# Altium PCB ATMEGA8_S52.PcbDoc
Units mil, origin at the board's own origin, x right, y up, seen from the top; angles counter-clockwise.
Board outline 6000 x 4000 mil, 2 copper layers (Top Layer, Bottom Layer); 2 components, 39 nets, 68 pads, 6 vias.
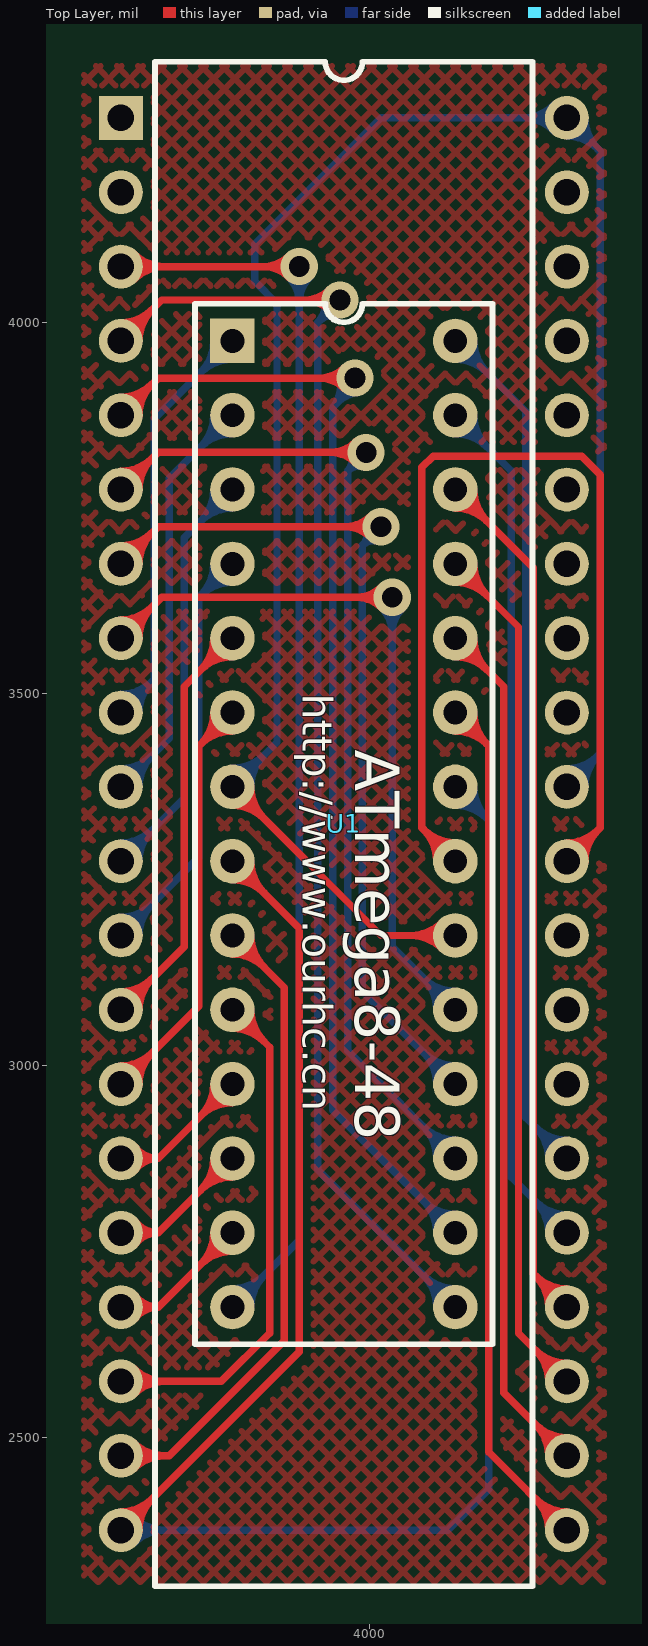
[diagram p0: Top Layer view]
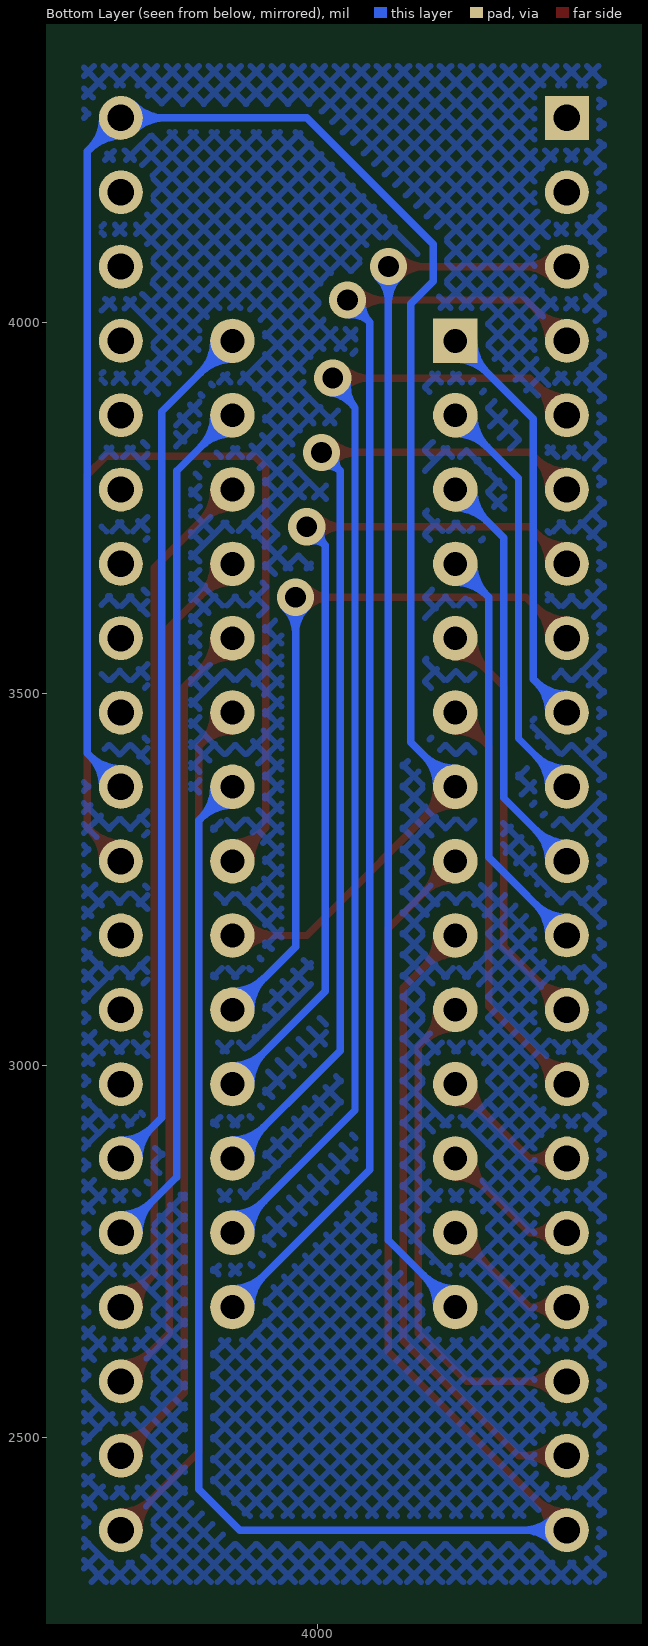
[diagram p1: Bottom Layer view, seen from below]

## Layer stack, top to bottom
Top Layer: signal copper 1.4
Dielectric: dielectric 12.6, FR-4, Dk 4.8
Bottom Layer: signal copper 1.4

## Board outline
1000,1000 7000,1000 7000,5000 1000,5000

## Design rules (kind name [scope] priority, off if disabled: settings)
Clearance [All] p1: gap=10
ComponentClearance [All] p1: gap=10 collisioncheckmode=3 verticalgap=10
PolygonConnect [All] p1: connectstyle=Relief reliefconductorwidth=10 reliefentries=4 polygonreliefangle="90 Angle"
RoutingVias [All] p1: holewidth=28 width=50 viastyle="Through Hole" minholewidth=28 minwidth=50 maxholewidth=28 maxwidth=50
SolderMaskExpansion [All] p1: expansion=4
TestPointUsage [All] p1: valid=0 allowmultiple=FALSE
Testpoint [All] p1: side=15 testpointundercomponent=TRUE minsize=40 maxsize=100 preferedsize=60 minholesize=0 maxholesize=40 preferedholesize=32 testpointgrid=1 style=1023 order=0123456789
Width [All] p1: maxlimit=10 minlimit=10 preferedwidth=10
17 further rules are at their usual default settings.

## Components (designator, comment, footprint, x,y, rotation, side; value= is the part's Value field where it differs from the comment)
ATmega8-48 "ATmega8-16PI" 底座DIP-28/引脚7.62mm 3965,3325 r270 top
U1 "AT89S52" DIP-40 3965,3325 r270 top

## Footprints (in the part's own frame and the unit in brackets; to place one, negate y for a bottom-side part, rotate by r counter-clockwise, add the part's x,y. Pads: shape width x height; smd on the part's side, far side on the other; paste and mask are expansions set on the pad)
DIP-40 [mm] "DIP; 40 Leads; Row Spacing 15.24 mm; Pitch 2.54 mm"
  rect 1.5x1.5 hole 0.9: 1(-24.13,-7.62)
  round 1.5 hole 0.9: 2(-21.59,-7.62) 3(-19.05,-7.62) 4(-16.51,-7.62) 5(-13.97,-7.62) 6(-11.43,-7.62) 7(-8.89,-7.62) 8(-6.35,-7.62) 9(-3.81,-7.62) 10(-1.27,-7.62) 11(1.27,-7.62) 12(3.81,-7.62) 13(6.35,-7.62) 14(8.89,-7.62) 15(11.43,-7.62) 16(13.97,-7.62) 17(16.51,-7.62) 18(19.05,-7.62) 19(21.59,-7.62) 20(24.13,-7.62) 21(24.13,7.62) 22(21.59,7.62) 23(19.05,7.62) 24(16.51,7.62) 25(13.97,7.62) 26(11.43,7.62) 27(8.89,7.62) 28(6.35,7.62) 29(3.81,7.62) 30(1.27,7.62) 31(-1.27,7.62) 32(-3.81,7.62) 33(-6.35,7.62) 34(-8.89,7.62) 35(-11.43,7.62) 36(-13.97,7.62) 37(-16.51,7.62) 38(-19.05,7.62) 39(-21.59,7.62) 40(-24.13,7.62)
  silkscreen extent -26.05,-6.45 26.05,6.45
底座DIP-28/引脚7.62mm [mil] "引脚跨度 ：300 Mil ，主体外形 10.1×35.5mm（400×1400Mil）"
  rect 60x60 hole 32: 1(-650,-150)
  round 60 hole 32: 2(-550,-150) 3(-450,-150) 4(-350,-150) 5(-250,-150) 6(-150,-150) 7(-50,-150) 8(50,-150) 9(150,-150) 10(250,-150) 11(350,-150) 12(450,-150) 13(550,-150) 14(650,-150) 15(650,150) 16(550,150) 17(450,150) 18(350,150) 19(250,150) 20(150,150) 21(50,150) 22(-50,150) 23(-150,150) 24(-250,150) 25(-350,150) 26(-450,150) 27(-550,150) 28(-650,150)
  silkscreen extent -700,-200 700,200

## Part data
ATmega8-48: library part ATmega8-P, "8 位微处理器/28引脚"
U1: library part 8051

## Via types
v1: diameter 50, hole 28, Top Layer to Bottom Layer, 6 vias

## Nets (pads, with @x,y where several pads share a name; then routed paths per layer and width w, separated by ;. In a path a pad name is that pad's centre, name@x,y a point inside that pad or via, vN(x,y) a via of type N, cw(c..) or ccw(c..) an arc to the next point about the centre after c; other vN are vias at no path point)
ALE: ATmega8-48.21 U1.30 | length 1643.6
  Top Layer w10: ATmega8-48.21@4090,3275 ccw(c4029.64,3275) 4072.32,3317.68 ccw(c4115,3360.36) ATmega8-48.21@4115,3300 ; ATmega8-48.21@4100,3275 ccw(c4063.79,3275) 4089.39,3300.61 ccw(c4115,3326.21) ATmega8-48.21@4115,3290 ; ATmega8-48.21 4070,3320 4070,3805 4085,3820 4285,3820 4310,3795 4310,3320 U1.30 ; U1.30@4265,3289.53 ccw(c4265,3324.6) 4289.8,3299.8 ccw(c4314.6,3275) U1.30@4279.53,3275 ; U1.30@4265,3299.53 ccw(c4265,3358.74) 4306.87,3316.87 ccw(c4348.74,3275) U1.30@4289.53,3275
GND: ATmega8-48.8 ATmega8-48.22 U1.20 | length 3117.7
  Top Layer w10: U1.20 3905,2615 3905,3185 ATmega8-48.8 ; U1.20@3665,2389.53 ccw(c3665,2424.6) 3689.8,2399.8 ccw(c3714.6,2375) U1.20@3679.53,2375 ; U1.20@3665,2399.53 ccw(c3665,2458.74) 3706.87,2416.87 ccw(c3748.74,2375) U1.20@3689.53,2375 ; ATmega8-48.8@3815,3250 cw(c3815,3189.64) 3857.68,3232.32 cw(c3900.36,3275) ATmega8-48.8@3840,3275 ; ATmega8-48.8@3815,3260 cw(c3815,3223.79) 3840.61,3249.39 cw(c3866.21,3275) ATmega8-48.8@3830,3275
  Bottom Layer w10: U1.20 4105,2375 4160,2430 4160,3330 ATmega8-48.22 ; U1.20@3675.27,2364.73 cw(c3700.07,2339.93) 3700.07,2375 cw(c3700.07,2410.07) U1.20@3675.27,2385.27 ; U1.20@3682.34,2357.66 cw(c3724.21,2315.79) 3724.21,2375 cw(c3724.21,2434.21) U1.20@3682.34,2392.34 ; ATmega8-48.22@4115,3350 cw(c4115,3289.64) 4157.68,3332.32 cw(c4200.36,3375) ATmega8-48.22@4140,3375 ; ATmega8-48.22@4115,3360 cw(c4115,3323.79) 4140.61,3349.39 cw(c4166.21,3375) ATmega8-48.22@4130,3375
P0.0: U1.39
P0.1: U1.38
P0.2: U1.37
P0.3: U1.36
P0.4: U1.35
P0.5: U1.34
P0.6: U1.33
P0.7: U1.32
P1.0: U1.1
P1.1: U1.2
P1.2: ATmega8-48.14 U1.3 | length 2128.8
  Top Layer w10: U1.3 v1(3905,4075) ; U1.3@3675.27,4064.73 cw(c3700.07,4039.93) 3700.07,4075 cw(c3700.07,4110.07) U1.3@3675.27,4085.27 ; U1.3@3682.34,4057.66 cw(c3724.21,4015.79) 3724.21,4075 cw(c3724.21,4134.21) U1.3@3682.34,4092.34 ; v1@3890.86,4060.86 ccw(c3856.72,4026.72) 3856.72,4075 ccw(c3856.72,4123.28) v1@3890.86,4089.14
  Bottom Layer w10: ATmega8-48.14 3905,2765 v1(3905,4075) ; ATmega8-48.14@3815,2690 ccw(c3815,2726.21) 3840.61,2700.61 ccw(c3866.21,2675) ATmega8-48.14@3830,2675 ; ATmega8-48.14@3815,2700 ccw(c3815,2760.36) 3857.68,2717.68 ccw(c3900.36,2675) ATmega8-48.14@3840,2675 ; v1@3890.86,4060.86 cw(c3856.72,4026.72) 3905,4026.72 cw(c3953.28,4026.72) v1@3919.14,4060.86
P1.3: ATmega8-48.15 U1.4 | length 2199.1
  Top Layer w10: U1.4 3720,4030 v1(3960,4030) ; U1.4@3665,3989.53 ccw(c3665,4024.6) 3689.8,3999.8 ccw(c3714.6,3975) U1.4@3679.53,3975 ; U1.4@3665,3999.53 ccw(c3665,4058.74) 3706.87,4016.87 ccw(c3748.74,3975) U1.4@3689.53,3975 ; v1@3945.86,4015.86 ccw(c3911.72,3981.72) 3911.72,4030 ccw(c3911.72,4078.28) v1@3945.86,4044.14
  Bottom Layer w10: v1@3940.09,4028.09 cw(c3905.26,4024.75) 3930,4000 ; v1@3958.09,4010.09 ccw(c3954.75,3975.26) 3930,4000 ; v1(3960,4030) 3930,4000 ; ATmega8-48.15@4090,2675 ccw(c4029.64,2675) 4072.32,2717.68 ccw(c4115,2760.36) ATmega8-48.15@4115,2700 ; ATmega8-48.15@4100,2675 ccw(c4063.79,2675) 4089.39,2700.61 ccw(c4115,2726.21) ATmega8-48.15@4115,2690 ; ATmega8-48.15 3930,2860 3930,4000
P1.4: ATmega8-48.16 U1.5 | length 2015.5
  Top Layer w10: U1.5 3715,3925 v1(3980,3925) ; U1.5@3665,3889.53 ccw(c3665,3924.6) 3689.8,3899.8 ccw(c3714.6,3875) U1.5@3679.53,3875 ; U1.5@3665,3899.53 ccw(c3665,3958.74) 3706.87,3916.87 ccw(c3748.74,3875) U1.5@3689.53,3875 ; v1@3965.86,3910.86 ccw(c3931.72,3876.72) 3931.72,3925 ccw(c3931.72,3973.28) v1@3965.86,3939.14
  Bottom Layer w10: v1@3960.2,3922.17 cw(c3912.4,3915.34) 3951.03,3886.37 cw(c3989.66,3857.4) v1@3982.83,3905.2 ; v1(3980,3925) 3950,3885 3950,2940 ATmega8-48.16 ; ATmega8-48.16@4090,2775 ccw(c4029.64,2775) 4072.32,2817.68 ccw(c4115,2860.36) ATmega8-48.16@4115,2800 ; ATmega8-48.16@4100,2775 ccw(c4063.79,2775) 4089.39,2800.61 ccw(c4115,2826.21) ATmega8-48.16@4115,2790
P1.5: ATmega8-48.17 U1.6 | length 1790.5
  Top Layer w10: U1.6 3715,3825 v1(3995,3825) ; U1.6@3665,3789.53 ccw(c3665,3824.6) 3689.8,3799.8 ccw(c3714.6,3775) U1.6@3679.53,3775 ; U1.6@3665,3799.53 ccw(c3665,3858.74) 3706.87,3816.87 ccw(c3748.74,3775) U1.6@3689.53,3775 ; v1@3980.86,3810.86 ccw(c3946.72,3776.72) 3946.72,3825 ccw(c3946.72,3873.28) v1@3980.86,3839.14
  Bottom Layer w10: v1@3975.59,3820.16 cw(c3954.98,3815.03) 3970,3800 ; v1@3990.16,3805.59 ccw(c3985.03,3784.98) 3970,3800 ; v1(3995,3825) 3970,3800 ; ATmega8-48.17@4090,2875 ccw(c4029.64,2875) 4072.32,2917.68 ccw(c4115,2960.36) ATmega8-48.17@4115,2900 ; ATmega8-48.17@4100,2875 ccw(c4063.79,2875) 4089.39,2900.61 ccw(c4115,2926.21) ATmega8-48.17@4115,2890 ; ATmega8-48.17 3970,3020 3970,3800
P1.6: ATmega8-48.18 U1.7 | length 1602.2
  Top Layer w10: U1.7 3715,3725 v1(4015,3725) ; U1.7@3665,3689.53 ccw(c3665,3724.6) 3689.8,3699.8 ccw(c3714.6,3675) U1.7@3679.53,3675 ; U1.7@3665,3699.53 ccw(c3665,3758.74) 3706.87,3716.87 ccw(c3748.74,3675) U1.7@3689.53,3675 ; v1@4000.86,3710.86 ccw(c3966.72,3676.72) 3966.72,3725 ccw(c3966.72,3773.28) v1@4000.86,3739.14
  Bottom Layer w10: v1@3995.59,3720.16 cw(c3974.98,3715.03) 3990,3700 ; v1@4010.16,3705.59 ccw(c4005.03,3684.98) 3990,3700 ; v1(4015,3725) 3990,3700 ; ATmega8-48.18@4090,2975 ccw(c4029.64,2975) 4072.32,3017.68 ccw(c4115,3060.36) ATmega8-48.18@4115,3000 ; ATmega8-48.18@4100,2975 ccw(c4063.79,2975) 4089.39,3000.61 ccw(c4115,3026.21) ATmega8-48.18@4115,2990 ; ATmega8-48.18 3990,3100 3990,3700
P1.7: ATmega8-48.19 U1.8 | length 1429.5
  Top Layer w10: U1.8 3720,3630 v1(4030,3630) ; U1.8@3665,3589.53 ccw(c3665,3624.6) 3689.8,3599.8 ccw(c3714.6,3575) U1.8@3679.53,3575 ; U1.8@3665,3599.53 ccw(c3665,3658.74) 3706.87,3616.87 ccw(c3748.74,3575) U1.8@3689.53,3575 ; v1@4015.86,3615.86 ccw(c3981.72,3581.72) 3981.72,3630 ccw(c3981.72,3678.28) v1@4015.86,3644.14
  Bottom Layer w10: v1@4015.86,3615.86 cw(c3981.72,3581.72) 4030,3581.72 cw(c4078.28,3581.72) v1@4044.14,3615.86 ; v1(4030,3630) 4030,3160 ATmega8-48.19 ; ATmega8-48.19@4090,3075 ccw(c4029.64,3075) 4072.32,3117.68 ccw(c4115,3160.36) ATmega8-48.19@4115,3100 ; ATmega8-48.19@4100,3075 ccw(c4063.79,3075) 4089.39,3100.61 ccw(c4115,3126.21) ATmega8-48.19@4115,3090
P2.0: ATmega8-48.23 U1.21 | length 1461.9
  Top Layer w10: ATmega8-48.23@4115,3450 cw(c4115,3389.64) 4157.68,3432.32 cw(c4200.36,3475) ATmega8-48.23@4140,3475 ; ATmega8-48.23@4115,3460 cw(c4115,3423.79) 4140.61,3449.39 cw(c4166.21,3475) ATmega8-48.23@4130,3475 ; ATmega8-48.23 4160,3430 4160,2480 U1.21 ; U1.21@4240.47,2375 ccw(c4181.26,2375) 4223.13,2416.87 ccw(c4265,2458.74) U1.21@4265,2399.53 ; U1.21@4250.47,2375 ccw(c4215.4,2375) 4240.2,2399.8 ccw(c4265,2424.6) U1.21@4265,2389.53
P2.1: ATmega8-48.24 U1.22 | length 1461.9
  Top Layer w10: ATmega8-48.24@4115,3550 cw(c4115,3489.64) 4157.68,3532.32 cw(c4200.36,3575) ATmega8-48.24@4140,3575 ; ATmega8-48.24@4115,3560 cw(c4115,3523.79) 4140.61,3549.39 cw(c4166.21,3575) ATmega8-48.24@4130,3575 ; ATmega8-48.24 4180,3510 4180,2560 U1.22 ; U1.22@4240.47,2475 ccw(c4181.26,2475) 4223.13,2516.87 ccw(c4265,2558.74) U1.22@4265,2499.53 ; U1.22@4250.47,2475 ccw(c4215.4,2475) 4240.2,2499.8 ccw(c4265,2524.6) U1.22@4265,2489.53
P2.2: ATmega8-48.25 U1.23 | length 1461.9
  Top Layer w10: ATmega8-48.25@4115,3650 cw(c4115,3589.64) 4157.68,3632.32 cw(c4200.36,3675) ATmega8-48.25@4140,3675 ; ATmega8-48.25@4115,3660 cw(c4115,3623.79) 4140.61,3649.39 cw(c4166.21,3675) ATmega8-48.25@4130,3675 ; ATmega8-48.25 4200,3590 4200,2640 U1.23 ; U1.23@4240.47,2575 ccw(c4181.26,2575) 4223.13,2616.87 ccw(c4265,2658.74) U1.23@4265,2599.53 ; U1.23@4250.47,2575 ccw(c4215.4,2575) 4240.2,2599.8 ccw(c4265,2624.6) U1.23@4265,2589.53
P2.3: ATmega8-48.26 U1.24 | length 1461.9
  Top Layer w10: ATmega8-48.26@4115,3750 cw(c4115,3689.64) 4157.68,3732.32 cw(c4200.36,3775) ATmega8-48.26@4140,3775 ; ATmega8-48.26@4115,3760 cw(c4115,3723.79) 4140.61,3749.39 cw(c4166.21,3775) ATmega8-48.26@4130,3775 ; ATmega8-48.26 4220,3670 4220,2720 U1.24 ; U1.24@4240.47,2675 ccw(c4181.26,2675) 4223.13,2716.87 ccw(c4265,2758.74) U1.24@4265,2699.53 ; U1.24@4250.47,2675 ccw(c4215.4,2675) 4240.2,2699.8 ccw(c4265,2724.6) U1.24@4265,2689.53
P2.4: ATmega8-48.27 U1.25 | length 1461.9
  Bottom Layer w10: ATmega8-48.27@4115,3850 cw(c4115,3789.64) 4157.68,3832.32 cw(c4200.36,3875) ATmega8-48.27@4140,3875 ; ATmega8-48.27@4115,3860 cw(c4115,3823.79) 4140.61,3849.39 cw(c4166.21,3875) ATmega8-48.27@4130,3875 ; ATmega8-48.27 4190,3800 4190,2850 U1.25 ; U1.25@4240.47,2775 ccw(c4181.26,2775) 4223.13,2816.87 ccw(c4265,2858.74) U1.25@4265,2799.53 ; U1.25@4250.47,2775 ccw(c4215.4,2775) 4240.2,2799.8 ccw(c4265,2824.6) U1.25@4265,2789.53
P2.5: ATmega8-48.28 U1.26 | length 1461.9
  Bottom Layer w10: ATmega8-48.28@4115,3950 cw(c4115,3889.64) 4157.68,3932.32 cw(c4200.36,3975) ATmega8-48.28@4140,3975 ; ATmega8-48.28@4115,3960 cw(c4115,3923.79) 4140.61,3949.39 cw(c4166.21,3975) ATmega8-48.28@4130,3975 ; ATmega8-48.28 4210,3880 4210,2930 U1.26 ; U1.26@4240.47,2875 ccw(c4181.26,2875) 4223.13,2916.87 ccw(c4265,2958.74) U1.26@4265,2899.53 ; U1.26@4250.47,2875 ccw(c4215.4,2875) 4240.2,2899.8 ccw(c4265,2924.6) U1.26@4265,2889.53
P2.6: U1.27
P2.7: U1.28
P3.0: ATmega8-48.2 U1.10 | length 861.9
  Bottom Layer w10: U1.10 3730,3440 3730,3790 ATmega8-48.2 ; U1.10@3665,3389.53 ccw(c3665,3424.6) 3689.8,3399.8 ccw(c3714.6,3375) U1.10@3679.53,3375 ; U1.10@3665,3399.53 ccw(c3665,3458.74) 3706.87,3416.87 ccw(c3748.74,3375) U1.10@3689.53,3375 ; ATmega8-48.2@3790,3875 cw(c3729.64,3875) 3772.32,3832.32 cw(c3815,3789.64) ATmega8-48.2@3815,3850 ; ATmega8-48.2@3800,3875 cw(c3763.79,3875) 3789.39,3849.39 cw(c3815,3823.79) ATmega8-48.2@3815,3860
P3.1: ATmega8-48.3 U1.11 | length 861.9
  Bottom Layer w10: U1.11 3750,3360 3750,3710 ATmega8-48.3 ; U1.11@3665,3289.53 ccw(c3665,3324.6) 3689.8,3299.8 ccw(c3714.6,3275) U1.11@3679.53,3275 ; U1.11@3665,3299.53 ccw(c3665,3358.74) 3706.87,3316.87 ccw(c3748.74,3275) U1.11@3689.53,3275 ; ATmega8-48.3@3790,3775 cw(c3729.64,3775) 3772.32,3732.32 cw(c3815,3689.64) ATmega8-48.3@3815,3750 ; ATmega8-48.3@3800,3775 cw(c3763.79,3775) 3789.39,3749.39 cw(c3815,3723.79) ATmega8-48.3@3815,3760
P3.2: ATmega8-48.4 U1.12 | length 861.9
  Bottom Layer w10: U1.12 3770,3280 3770,3630 ATmega8-48.4 ; U1.12@3665,3189.53 ccw(c3665,3224.6) 3689.8,3199.8 ccw(c3714.6,3175) U1.12@3679.53,3175 ; U1.12@3665,3199.53 ccw(c3665,3258.74) 3706.87,3216.87 ccw(c3748.74,3175) U1.12@3689.53,3175 ; ATmega8-48.4@3790,3675 cw(c3729.64,3675) 3772.32,3632.32 cw(c3815,3589.64) ATmega8-48.4@3815,3650 ; ATmega8-48.4@3800,3675 cw(c3763.79,3675) 3789.39,3649.39 cw(c3815,3623.79) ATmega8-48.4@3815,3660
P3.3: ATmega8-48.5 U1.13 | length 861.9
  Top Layer w10: U1.13 3750,3160 3750,3510 ATmega8-48.5 ; U1.13@3665,3089.53 ccw(c3665,3124.6) 3689.8,3099.8 ccw(c3714.6,3075) U1.13@3679.53,3075 ; U1.13@3665,3099.53 ccw(c3665,3158.74) 3706.87,3116.87 ccw(c3748.74,3075) U1.13@3689.53,3075 ; ATmega8-48.5@3790,3575 cw(c3729.64,3575) 3772.32,3532.32 cw(c3815,3489.64) ATmega8-48.5@3815,3550 ; ATmega8-48.5@3800,3575 cw(c3763.79,3575) 3789.39,3549.39 cw(c3815,3523.79) ATmega8-48.5@3815,3560
P3.4: ATmega8-48.6 U1.14 | length 861.9
  Top Layer w10: U1.14 3770,3080 3770,3430 ATmega8-48.6 ; U1.14@3665,2989.53 ccw(c3665,3024.6) 3689.8,2999.8 ccw(c3714.6,2975) U1.14@3679.53,2975 ; U1.14@3665,2999.53 ccw(c3665,3058.74) 3706.87,3016.87 ccw(c3748.74,2975) U1.14@3689.53,2975 ; ATmega8-48.6@3790,3475 cw(c3729.64,3475) 3772.32,3432.32 cw(c3815,3389.64) ATmega8-48.6@3815,3450 ; ATmega8-48.6@3800,3475 cw(c3763.79,3475) 3789.39,3449.39 cw(c3815,3423.79) ATmega8-48.6@3815,3460
P3.5: ATmega8-48.11 U1.15 | length 455.5
  Top Layer w10: U1.15 3715,2875 ; U1.15@3676.49,2866.11 cw(c3694.61,2852.08) 3694.61,2875 cw(c3694.61,2897.92) U1.15@3676.49,2883.89 ; U1.15@3684.4,2859.99 cw(c3715,2836.31) 3715,2875 ; U1.15@3684.4,2890.01 ccw(c3715,2913.69) 3715,2875 ; ATmega8-48.11@3790,2975 cw(c3729.64,2975) 3772.32,2932.32 cw(c3815,2889.64) ATmega8-48.11@3815,2950 ; ATmega8-48.11@3800,2975 cw(c3763.79,2975) 3789.39,2949.39 cw(c3815,2923.79) ATmega8-48.11@3815,2960 ; ATmega8-48.11 3715,2875
P3.6: ATmega8-48.12 U1.16 | length 455.5
  Top Layer w10: U1.16 3715,2775 ; U1.16@3676.49,2766.11 cw(c3694.61,2752.08) 3694.61,2775 cw(c3694.61,2797.92) U1.16@3676.49,2783.89 ; U1.16@3684.4,2759.99 cw(c3715,2736.31) 3715,2775 ; U1.16@3684.4,2790.01 ccw(c3715,2813.69) 3715,2775 ; ATmega8-48.12@3790,2875 cw(c3729.64,2875) 3772.32,2832.32 cw(c3815,2789.64) ATmega8-48.12@3815,2850 ; ATmega8-48.12@3800,2875 cw(c3763.79,2875) 3789.39,2849.39 cw(c3815,2823.79) ATmega8-48.12@3815,2860 ; ATmega8-48.12 3715,2775
P3.7: ATmega8-48.13 U1.17 | length 455.5
  Top Layer w10: U1.17 3715,2675 ; U1.17@3676.49,2666.11 cw(c3694.61,2652.08) 3694.61,2675 cw(c3694.61,2697.92) U1.17@3676.49,2683.89 ; U1.17@3684.4,2659.99 cw(c3715,2636.31) 3715,2675 ; U1.17@3684.4,2690.01 ccw(c3715,2713.69) 3715,2675 ; ATmega8-48.13@3790,2775 cw(c3729.64,2775) 3772.32,2732.32 cw(c3815,2689.64) ATmega8-48.13@3815,2750 ; ATmega8-48.13@3800,2775 cw(c3763.79,2775) 3789.39,2749.39 cw(c3815,2723.79) ATmega8-48.13@3815,2760 ; ATmega8-48.13 3715,2675
PSEN: U1.29
RES: ATmega8-48.1 U1.9 | length 861.9
  Bottom Layer w10: U1.9 3710,3520 3710,3870 ATmega8-48.1 ; U1.9@3665,3489.53 ccw(c3665,3524.6) 3689.8,3499.8 ccw(c3714.6,3475) U1.9@3679.53,3475 ; U1.9@3665,3499.53 ccw(c3665,3558.74) 3706.87,3516.87 ccw(c3748.74,3475) U1.9@3689.53,3475 ; ATmega8-48.1@3790,3975 cw(c3729.64,3975) 3772.32,3932.32 cw(c3815,3889.64) ATmega8-48.1@3815,3950 ; ATmega8-48.1@3800,3975 cw(c3763.79,3975) 3789.39,3949.39 cw(c3815,3923.79) ATmega8-48.1@3815,3960
VCC: ATmega8-48.7 ATmega8-48.20 U1.31 U1.40 | length 3477.2
  Top Layer w10: ATmega8-48.7@3815,3350 cw(c3815,3289.64) 3857.68,3332.32 cw(c3900.36,3375) ATmega8-48.7@3840,3375 ; ATmega8-48.7@3815,3360 cw(c3815,3323.79) 3840.61,3349.39 cw(c3866.21,3375) ATmega8-48.7@3830,3375 ; ATmega8-48.7 4015,3175 ATmega8-48.20 ; ATmega8-48.20@4097.32,3157.32 ccw(c4054.64,3114.64) 4054.64,3175 ccw(c4054.64,3235.36) ATmega8-48.20@4097.32,3192.68 ; ATmega8-48.20@4104.39,3164.39 ccw(c4078.79,3138.79) 4078.79,3175 ccw(c4078.79,3211.21) ATmega8-48.20@4104.39,3185.61
  Bottom Layer w10: ATmega8-48.7 3875,3435 3875,4025 3845,4055 3845,4105 4015,4275 U1.40 4310,4230 4310,3420 U1.31 ; ATmega8-48.7@3815,3390 ccw(c3815,3426.21) 3840.61,3400.61 ccw(c3866.21,3375) ATmega8-48.7@3830,3375 ; ATmega8-48.7@3815,3400 ccw(c3815,3460.36) 3857.68,3417.68 ccw(c3900.36,3375) ATmega8-48.7@3840,3375 ; U1.40@4247.66,4257.66 ccw(c4205.79,4215.79) 4205.79,4275 ccw(c4205.79,4334.21) U1.40@4247.66,4292.34 ; U1.40@4254.73,4264.73 ccw(c4229.93,4239.93) 4229.93,4275 ccw(c4229.93,4310.07) U1.40@4254.73,4285.27 ; U1.31@4265,3389.53 ccw(c4265,3424.6) 4289.8,3399.8 ccw(c4314.6,3375) U1.31@4279.53,3375 ; U1.31@4265,3399.53 ccw(c4265,3458.74) 4306.87,3416.87 ccw(c4348.74,3375) U1.31@4289.53,3375 ; U1.40@4265,4250.47 cw(c4265,4191.26) 4306.87,4233.13 cw(c4348.74,4275) U1.40@4289.53,4275 ; U1.40@4265,4260.47 cw(c4265,4225.4) 4289.8,4250.2 cw(c4314.6,4275) U1.40@4279.53,4275
X1: ATmega8-48.9 U1.19 | length 1158
  Top Layer w10: U1.19 3730,2475 3885,2630 3885,3105 ATmega8-48.9 ; U1.19@3675.27,2464.73 cw(c3700.07,2439.93) 3700.07,2475 cw(c3700.07,2510.07) U1.19@3675.27,2485.27 ; U1.19@3682.34,2457.66 cw(c3724.21,2415.79) 3724.21,2475 cw(c3724.21,2534.21) U1.19@3682.34,2492.34 ; ATmega8-48.9@3815,3150 cw(c3815,3089.64) 3857.68,3132.32 cw(c3900.36,3175) ATmega8-48.9@3840,3175 ; ATmega8-48.9@3815,3160 cw(c3815,3123.79) 3840.61,3149.39 cw(c3866.21,3175) ATmega8-48.9@3830,3175
X2: ATmega8-48.10 U1.18 | length 982.4
  Top Layer w10: U1.18 3800,2575 3865,2640 3865,3025 ATmega8-48.10 ; U1.18@3675.27,2564.73 cw(c3700.07,2539.93) 3700.07,2575 cw(c3700.07,2610.07) U1.18@3675.27,2585.27 ; U1.18@3682.34,2557.66 cw(c3724.21,2515.79) 3724.21,2575 cw(c3724.21,2634.21) U1.18@3682.34,2592.34 ; ATmega8-48.10@3815,3050 cw(c3815,2989.64) 3857.68,3032.32 cw(c3900.36,3075) ATmega8-48.10@3840,3075 ; ATmega8-48.10@3815,3060 cw(c3815,3023.79) 3840.61,3049.39 cw(c3866.21,3075) ATmega8-48.10@3830,3075

## Polygon pours and split planes (outlines as drawn)
no net on Top Layer (hatched 45Degree grid 20 track 8): 3615,4345 4315,4345 4315,2305 3615,2305
no net on Bottom Layer (hatched 45Degree grid 20 track 8): 3615,4345 4315,4345 4315,2305 3615,2305

## Silkscreen, mask and mechanical layers (free items; w line width, h text height)
Top Overlay:
  text "http://www.ourhc.cn" at 3910,3500 h40.31 r270
Mechanical 1:
  lines w10: 3600,2290 3600,4360 3630,4360 4315,4360 4330,4360 4330,4345 4330,2290 3610,2290 3600,2290